# Altium PCB pcb_numpad.PcbDoc
Units mil, origin at the board's own origin, x right, y up, seen from the top; angles counter-clockwise.
Board outline 2620 x 4535 mil, 2 copper layers (Top Layer, Bottom Layer); 31 components, 25 nets, 183 pads, 10 vias.
Unrouted connection lines stored in the file: 9.
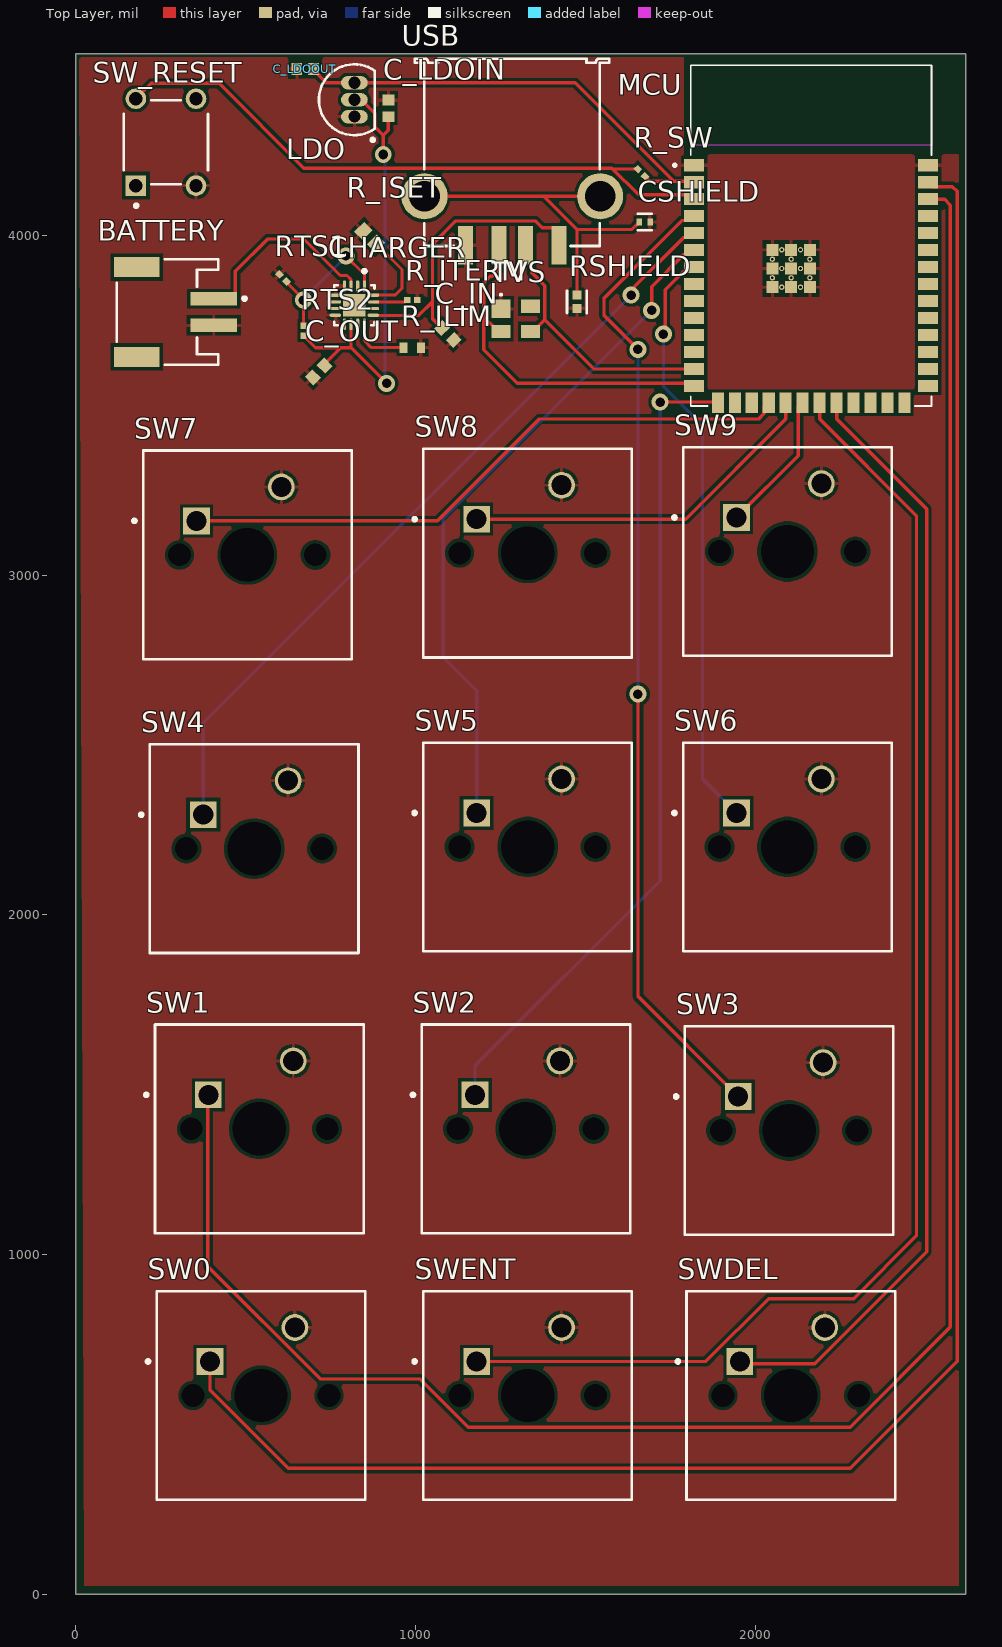
[diagram p0: Top Layer view]
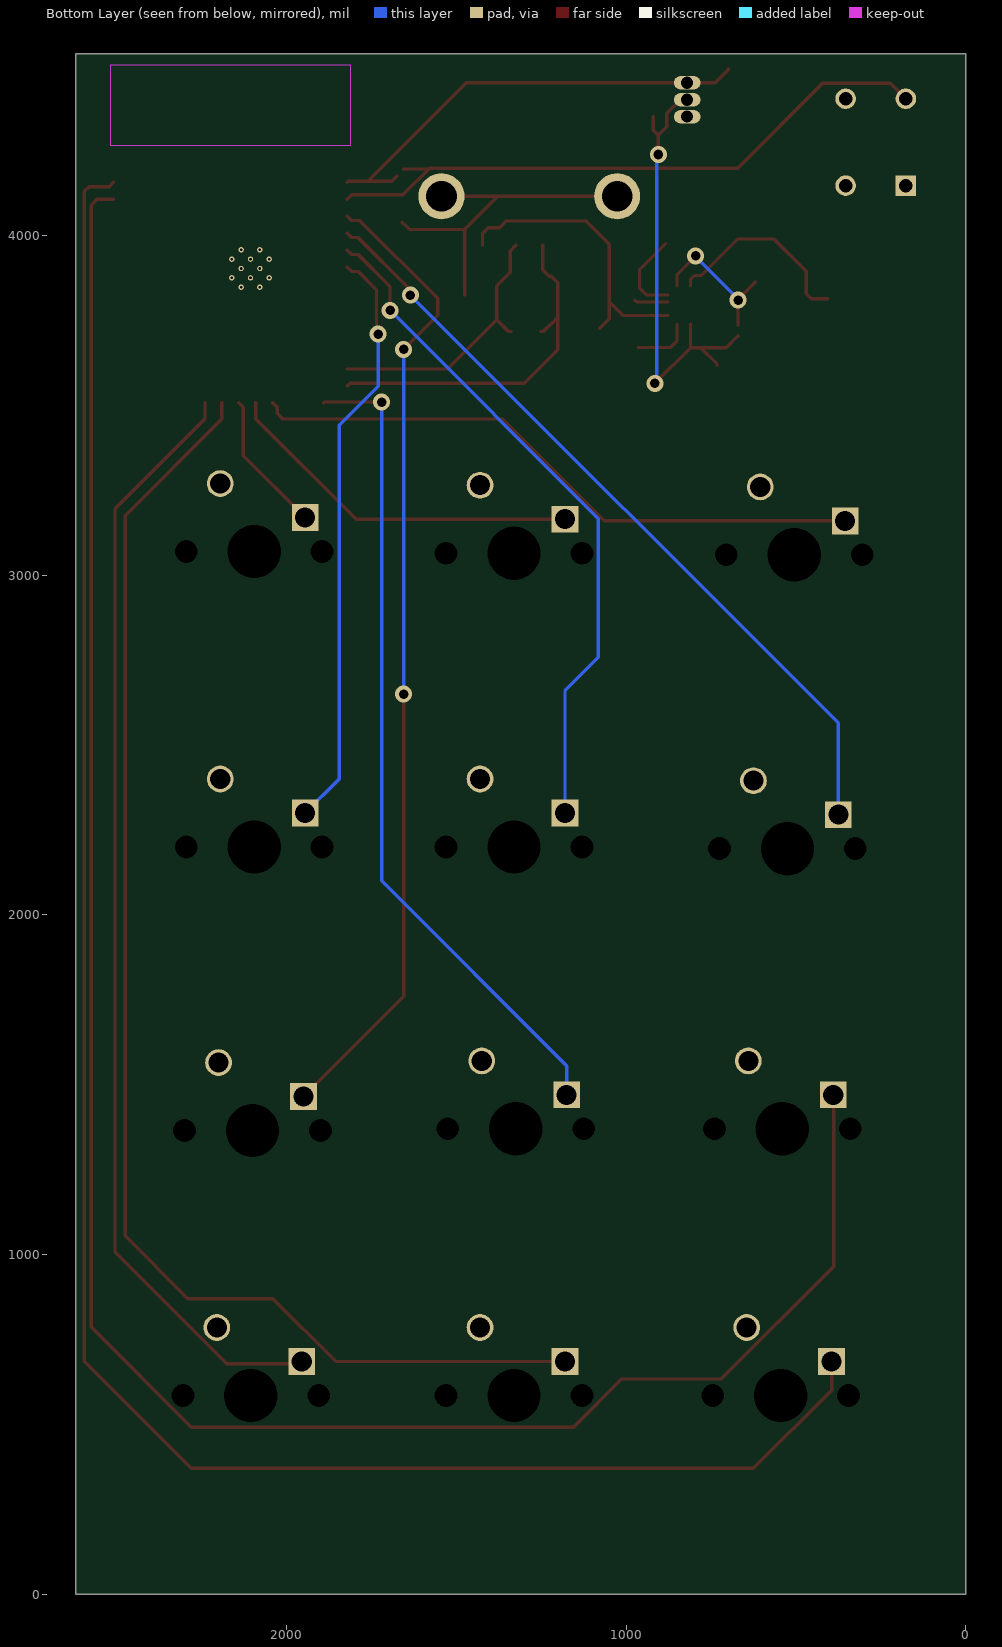
[diagram p1: Bottom Layer view, seen from below]

## Layer stack, top to bottom
Top Solder: solder mask 0.4, Solder Resist, Dk 3.5
Top Layer: signal copper 1.4
Dielectric 1: dielectric 12.6, FR-4, Dk 4.8
Bottom Layer: signal copper 1.4
Bottom Solder: solder mask 0.4, Solder Resist, Dk 3.5

## Board outline
0,0 2620,0 2620,4535 0,4535

## Design rules (kind name [scope] priority, off if disabled: settings)
Clearance [All] p1: gap=10 ignorepadtopadclearanceinfootprint=TRUE
PolygonConnect [All] p1: connectstyle=Relief reliefconductorwidth=10 reliefentries=4 polygonreliefangle="90 Angle" airgapwidth=10
RoutingVias [All] p1: holewidth=28 width=50 viastyle="Through Hole" minholewidth=28 minwidth=50 maxholewidth=28 maxwidth=50
SolderMaskExpansion [All] p1: expansion=4 istentingtop=FALSE
SupplyNets "Schematic Supply Nets" [InNet('GND')] p1: voltage=0.000
Width [All] p1: maxlimit=10 minlimit=9 preferedwidth=10 bottomlayer_minwidth=10 minimp=50.000000 maximp=50.000000 favimp=50.000000
30 further rules are at their usual default settings.

## Classes and differential pairs
component class numpad: BATTERY C_IN C_OUT CHARGER LDO MCU R_ILIM R_ISET R_ITERM RSHIELD RTS1 RTS2 SW0 SW1 SW2 SW3 SW4 SW5 SW6 SW7 SW8 SW9 SW_RESET SWDEL SWENT TVS

## Components (designator, comment, footprint, x,y, rotation, side; value= is the part's Value field where it differs from the comment)
BATTERY "500 mA" "JST- S2B-PH-SM4-TB(LF)(SN)-2_V" 270,3775 r270 top
C_IN "1 uF" CAPC1608X87X35LL15T15 1095,3710 r315 top
C_LDOIN "1 uF" CAPC1608X87X35LL15T15 920,4374.61 r90 top
C_LDOOUT "1 uF" CAPC1608X87X35LL15T15 675,4490 r0 top
C_OUT "1 uF" CAPC1608X87X35LL15T15 715,3600 r225 top
CHARGER "BQ24074RGTR" FP-RGT0016C-IPC_B 820,3795 r270 top
CSHIELD "0.1 uF" FP-GRM15-MFG 1675,4040 r0 top value=0.10μF
LDO "MCP1700-3302E/TO" TO-92-TO3 820,4400 r0 top
MCU "ESP32-S3-WROOM-1-N16R2" XCVR_ESP32-S3-WROOM-1-N16R2 2165,4000 r0 top
R_ILIM "2.2 K" RESC1608X55X25LL10T15 990,3670 r180 top
R_ISET "CRCW" RESC1609X50X30ML10T20 865,3995 r315 top
R_ITERM "RC04" RESC1005X40X25LL05T10 990.24,3810 r180 top
R_SW "10 K" RESC1005X40X25LL05T10 1665,4185 r135 top
RSHIELD "1 M" FP-MCR01-IPC_A 1475,3805 r90 top
RTS1 "10 K" RESC1005X40X25LL05T10 609.56,3875.44 r315 top
RTS2 "10 K" RESC1005X40X25LL05T10 670,3720 r90 top
SW0 "MX1A-11NW" CHRY-MX1A-11NW_V 545,585 r0 top
SW1 "MX1A-11NW" CHRY-MX1A-11NW_V 540,1370 r0 top
SW2 "MX1A-11NW" CHRY-MX1A-11NW_V 1325,1370 r0 top
SW3 "MX1A-11NW" CHRY-MX1A-11NW_V 2100,1365 r0 top
SW4 "MX1A-11NW" CHRY-MX1A-11NW_V 525,2195 r0 top
SW5 "MX1A-11NW" CHRY-MX1A-11NW_V 1330,2200 r0 top
SW6 "MX1A-11NW" CHRY-MX1A-11NW_V 2095,2200 r0 top
SW7 "MX1A-11NW" CHRY-MX1A-11NW_V 505,3060 r0 top
SW8 "MX1A-11NW" CHRY-MX1A-11NW_V 1330,3065 r0 top
SW9 "MX1A-11NW" CHRY-MX1A-11NW_V 2095,3070 r0 top
SW_RESET "3-1825910-1" FP-3-1825910-1-MFG 265,4275 r90 top
SWDEL "MX1A-11NW" CHRY-MX1A-11NW_V 2105,585 r0 top
SWENT "MX1A-11NW" CHRY-MX1A-11NW_V 1330,585 r0 top
TVS "8240116" WE-TVS_SOT143-4L 1295,3755 r270 top
USB "62900416021" 62900416021 1285,4245 r180 top

## Footprints (in the part's own frame and the unit in brackets; to place one, negate y for a bottom-side part, rotate by r counter-clockwise, add the part's x,y. Pads: shape width x height; smd on the part's side, far side on the other; paste and mask are expansions set on the pad)
62900416021 [mm] "USB 2.0 SMT Type A Horizontal"
  rect 1.12x2.88 smd: 1(-3.5,6.95) 2(-1,6.95) 3(1,6.95) 4(3.5,6.95)
  round 3.45 hole 2.3: Shell(-6.57,3.28) Shell(6.57,3.28)
  silkscreen extent -7.25,-7 7.29,7, body extent -7.81,-7 7.81,8.41, height 7.81
CAPC1608X87X35LL15T15 [mm] "Chip Capacitor, 2-Leads, Body 1.60x0.80mm, IPC High Density"
  rect 0.8x0.9 smd: 1(-0.625,0) 2(0.625,0)
  body extent -0.87,-0.48 0.87,0.48, height 0.87
CHRY-MX1A-11NW_V [mm] "THD, 2-Leads, Body 15.6x15.6mm"
  rect 2x2 hole 1.499 paste-2539.97: 1(-3.81,2.54)
  round 2 hole 1.499 paste-2539.97: 2(2.54,5.08)
  round 0 hole 3.988 unplated paste-2539.97: MH1(0,0)
  round 0 hole 1.702 unplated paste-2539.97: MH2(-5.08,0) MH3(5.08,0)
  silkscreen extent -8.57,-7.8 7.8,7.8, body extent -7.8,-7.8 7.8,7.8, height 15.2
FP-3-1825910-1-MFG [mm]
  rect 1.54x1.54 hole 0.99 paste-2539.97 mask+0: 1(-3.25,2.25)
  round 1.54 hole 0.99 paste-2539.97 mask+0: 2(3.25,2.25) 3(-3.25,-2.25) 4(3.25,-2.25)
  silkscreen extent -4.87,-3.15 3.15,3.15, body extent -4.12,-3.24 4.12,3.24, height 0.25
FP-GRM15-MFG [mm]
  rect 0.4x0.5 smd paste+0 mask+0: 1(-0.4,0) 2(0.4,0)
  silkscreen extent -0.53,-0.63 0.53,0.63, body extent -0.7,-0.38 0.7,0.38, height 0.25
FP-MCR01-IPC_A [mil]
  rect 26.24x26.48 smd paste+0 mask+0: 1(-19.8,0) 2(19.8,0)
  silkscreen extent -33,-29 33,29, body extent -41,-21 41,21, height 10
FP-RGT0016C-IPC_B [mm]
  rect 0.866x0.239 smd paste+0 mask+0: 1(-1.423,0.75)
  rrect100% 0.866x0.239 smd paste+0 mask+0: 2(-1.423,0.25) 3(-1.423,-0.25) 4(-1.423,-0.75) 9(1.423,-0.75) 10(1.423,-0.25) 11(1.423,0.25) 12(1.423,0.75)
  rrect100% 0.239x0.866 smd paste+0 mask+0: 5(-0.75,-1.423) 6(-0.25,-1.423) 7(0.25,-1.423) 8(0.75,-1.423) 13(0.75,1.423) 14(0.25,1.423) 15(-0.25,1.423) 16(-0.75,1.423)
  rect 1.68x1.68 smd paste-1000 mask+0: 17(0,0)
  silkscreen extent -2.67,-1.5 1.5,1.5, body extent -2.11,-2.11 2.11,2.11, height 0.25
"JST- S2B-PH-SM4-TB(LF)(SN)-2_V" [mm] "SMD, 2-Leads, Body 7.9x7.6mm, Pitch 2mm"
  rect 1x3.5 smd: 1(-1,3.45) 2(1,3.45)
  rect 1.5x3.4 smd: MP1(-3.35,-2.3) MP2(3.35,-2.3)
  silkscreen extent -3.95,-3.8 3.95,5.88, body extent -3.95,-3.8 3.95,4.8, height 5.6
RESC1005X40X25LL05T10 [mm] "Chip Resistor, 2-Leads, Body 1.00x0.50mm, IPC High Density"
  rect 0.5x0.45 smd: 1(-0.375,0) 2(0.375,0)
  body extent -0.53,-0.27 0.53,0.28, height 0.4
RESC1608X55X25LL10T15 [mm] "Chip Resistor, 2-Leads, Body 1.60x0.80mm, IPC High Density"
  rect 0.6x0.8 smd: 1(-0.65,0) 2(0.65,0)
  body extent -0.85,-0.45 0.85,0.45, height 0.55
RESC1609X50X30ML10T20 [mm] "Chip Resistor, 2-Leads, Body 1.55x0.85mm, IPC Low Density"
  rect 0.9x1.05 smd: 1(-0.675,0) 2(0.675,0)
  body extent -0.82,-0.48 0.82,0.48, height 0.5
TO-92-TO3 [mm] "TO, Flat Index; 3 In-Line, Axial Leads; Body Dia. 4.8mm; Leads 0.56 x 0.53 mm (max)"
  oval 2x1 hole 0.9: 1(0,-1.27) 2(0,0) 3(0,1.27)
  silkscreen extent -2.65,-3.13 1.52,2.65, body extent -2.65,-2.66 1.52,2.66, height 5.33
WE-TVS_SOT143-4L [mm] "TVS Diode, package SOT143-4L"
  rect 1.4x1.4 smd: 1(-0.75,-1.1)
  rect 1x1.4 smd: 2(0.95,-1.1) 3(0.95,1.1) 4(-0.95,1.1)
  silkscreen extent -1.87,-1.17 -1.73,-1.02, body extent -1.46,-1.2 1.46,1.2, height 1.05
XCVR_ESP32-S3-WROOM-1-N16R2 [mm]
  rect 1.5x0.9 smd: 2(-8.75,3.99) 3(-8.75,2.72) 4(-8.75,1.45) 5(-8.75,0.18) 6(-8.75,-1.09) 7(-8.75,-2.36) 8(-8.75,-3.63) 9(-8.75,-4.9) 10(-8.75,-6.17) 11(-8.75,-7.44) 12(-8.75,-8.71) 13(-8.75,-9.98) 14(-8.75,-11.25) 27(8.75,-11.25) 28(8.75,-9.98) 29(8.75,-8.71) 30(8.75,-7.44) 31(8.75,-6.17) 32(8.75,-4.9) 33(8.75,-3.63) 34(8.75,-2.36) 35(8.75,-1.09) 36(8.75,0.18) 37(8.75,1.45) 38(8.75,2.72) 39(8.75,3.99) GND(-8.75,5.26) GND(8.75,5.26)
  rect 0.9x1.5 smd: 15(-6.985,-12.5) 16(-5.715,-12.5) 17(-4.445,-12.5) 18(-3.175,-12.5) 19(-1.905,-12.5) 20(-0.635,-12.5) 21(0.635,-12.5) 22(1.905,-12.5) 23(3.175,-12.5) 24(4.445,-12.5) 25(5.715,-12.5) 26(6.985,-12.5)
  round 0.4 hole 0.2 mask+0: 41_10(-1.5,-1.76) 41_11(-2.9,-1.76) 41_12(-0.1,-1.76) 41_13(-2.9,-3.16) 41_14(-1.5,-3.16) 41_15(-0.1,-3.16) 41_16(-2.2,-1.06) 41_17(-0.8,-1.06) 41_18(-2.2,-2.46) 41_19(-0.8,-2.46) 41_20(-2.2,-3.86) 41_21(-0.8,-3.86)
  rect 0.9x0.9 smd: GND(-2.9,-3.86) GND(-2.9,-2.46) GND(-2.9,-1.06) GND(-1.5,-3.86) GND(-1.5,-2.46) GND(-1.5,-1.06) GND(-0.1,-3.86) GND(-0.1,-2.46) GND(-0.1,-1.06)
  Keep-Out Layer region: 9,6.75 -9,6.75 -9,12.75 9,12.75
  Keep-Out Layer region: 9,6.75 -9,6.75 -9,12.75 9,12.75
  silkscreen extent -10.3,-12.75 9,12.75, body extent -9,-12.75 9,12.75, height 3.25

## Part data
BATTERY: library part CMP-1755-00001-1, "Male Header, Pitch 2 mm, 1 x 2 Position, Height 5.5 mm, -25 to 85 degC, RoHS, Tape and Reel", Colour=Black, Current Rating="3 A", Max Operating Temperature=105degC, Min Operating Temperature=-65degC, Package Quantity=100, ComponentLink1Description="Manufacturer URL", ComponentLink1URL=http://www.jst.com/home2.html, ComponentLink2Description=Datasheet, ComponentLink2URL=http://www.jst-mfg.com/product/pdf/eng/ePH.pdf, Contact Finish=Lead, Contact Material=Bronze, Contact Plating=Tin, DatasheetVersion=Dec-12, Height="8.13 mm", Lead Pitch="0.1 inch", Length="101.19 mm", Mount="Through Hole", PackageDescription="Male Header, Pitch 2 mm, 1 x 2 Position, Height 5.5 mm", PackageReference=S2B-PH-SM4-TB(LF)(SN)-2, Packaging=Bulk, Pins=40, Radiation Hardening=No, RoHSCompliant=True, Width="2.34 mm"
C_IN C_LDOIN C_LDOOUT C_OUT: library part CMP-2006-03713-1, Manufacturer=Kemet, Part Number=C0603C105K3RACTU
CHARGER: library part CMP-0321-00220-3, "IC LI-ION CHARGE MGMT 16-QFN", Battery Pack Voltage=4.2V, Case/Package=VQFN, Max Charge Current=1.5A, Max Operating Temperature=125°C, Max Supply Voltage=10.2V, Min Input Voltage=4.3V, Min Operating Temperature=-40°C, Min Supply Voltage=4.35V, Package Quantity=3000, Battery Chemistry=LITHIUM-ION, Contact Plating=Gold, Fault Protection="Over Voltage", Interface=USB, Lead Free="Lead Free", Number of Cells=1, Number of Pins=16, Output Current=1.5A, Output Voltage=4.2V, Packaging="Tape and Reel", Radiation Hardening=No, RoHS Compliant=Yes, Series=-, Weight=0.000808oz
CSHIELD: library part CMP-2100-03641-2, "CAP CER 0.1UF 16V X7R 0402", Capacitance=0.10μF, Manufacturer=Murata, Manufacturer Part Number=GRM155R71C104KA88D, Package=GRM15, Temperature="-55°C to +125°C", Temperature Characteristic=X7R, Temperature Range High=+125°C, Temperature Range Low=-55°C, Tolerance=10%, Voltage Rating=16Vdc, Category=Cap, ComponentLink2Description=Datasheet, ComponentLink2URL=https://search.murata.co.jp/Ceramy/image/img/A01X/G101/ENG/GRM155R71H471KA01-01A.pdf, Device Class L1="Passive Components", Device Class L2=Capacitors, Device Class L3="Ceramic Capacitors", Digikey Description="CAP CER 0.1UF 16V X7R 0402", Height=0.55mm, Ipc Land Pattern Name=CAPC10050X219, Lead Free=yes, Material=Ceramic, Mouser Description="0402 0.1 uF 16V ±10 % Tolerance X7R SMT Multilayer Ceramic Capacitor", Octopart=https://octopart.com/grm155r71c104ka88d-murata-196880, RoHS=TRUE, Standoff Height=0mm
LDO: library part CMP-0136-00007-1, "Low Quiescent Current LDO, 3-Pin TO-92, Extended TemperatureBAG", DatasheetVersion="revB, Feb-2007", PackageDescription="3-Lead Plastic Transistor Outline (TO) [TO-92]", PackageReference=TO-92-TO3, PackageVersion="revBB, Aug-2009"
MCU: library part CMP-003-000000-1, "Bluetooth, WiFi 802.11b/g/n, Bluetooth v5.0 Transceiver Module 2.4GHz PCB Trace Surface Mount", Package="NON STANDARD Espressif Systems", Check_prices=https://www.snapeda.com/parts/ESP32S3WROOM1N16R2/Espressif+Systems/view-part/?ref=eda, Component Type=Standard, Design Item ID=ESP32-S3-WROOM-1-N16R2, MF="Espressif Systems", MP=ESP32S3WROOM1N16R2, Pin Count=39, SnapEDA_Link=https://www.snapeda.com/parts/ESP32S3WROOM1N16R2/Espressif+Systems/view-part/?ref=snap, Source=ESP32-S3-WROOM-1-N16R2.SchLib
R_ILIM: library part CMP-2000-06934-1, "Thick Film Resistor, 2.2 KOhm, 100 mW, 50 V, +/- 1%, -55 to 155 degC, 2-Pin SMD (0603), RoHS, Tape and Reel", Case Code - in=0603, Case Code - mm=1608, Manufacturer=Yageo, Operating Temperature Range=-55Cto+155C, Package Description="2-Pin Surface Mount Device, Body 1.6 x 0.8 mm", Power Rating=100mW, Resistance=2.2kOhms, Temperature Coefficient=100PPM/C, Tolerance=1%, Voltage Rating=50V, Datasheet URL=http://www.yageo.com/documents/recent/PYu-RC_Group_51_RoHS_L_7.pdf, Datasheet Version="Rev. 7, 05/2017", Manufacturer URL=http://www.yageo.com/, Mounting Technology=SurfaceMount, Package Reference=0603, Packaging=Reel, Product=ThickFilmResistorsGeneralPurpose, Series=RC, Termination Style=SMD/SMT
R_ISET: library part CMP-2000-03159-1, Manufacturer="Vishay Dale", Part Number="2 K"
R_ITERM R_SW RTS1 RTS2: library part CMP-2002-07353-1, Manufacturer="Yageo / Phycomp", Part Number=RC0402FR-0710KL
RSHIELD: library part CMP-08839-004923-1, "Thick Film Chip Resistor, 0402, 1MΩ, 5%, 200ppm/°C, 0.063W, 50V", Case Code (Imperial)=0402, Case Code (Metric)=1005, Max Operating Temperature=155°C, Max Power Dissipation=63mW, Min Operating Temperature=-55°C, Package Quantity=1, Resistance=1MR, Resistor Type="Thick Film", Temperature Coefficient=200ppm/°C, Tolerance=5%, Voltage Rating (DC)=50V, Case/Package=0402, Height=0.016inch, Length=0.039inch, Number of Terminations=2, Packaging="Tape and Reel", RoHS Compliant=Yes, Series=MCR, Width=0.02inch
SW0 SW1 SW2 SW3 SW4 SW5 SW6 SW7 SW8 SW9 SWDEL SWENT: library part CMP-2000-06786-1, "Keylock Switch, 12 V, -10 to 70 degC, 2-Pin THD, RoHS, Bulk", Actuator Color=N/A, Illumination Color=N/R, Manufacturer=Cherry, Maximum AC Voltage Rating=12V, Maximum Contact Resistance=200mOhm, Maximum Current Rating=0.01A, Minimum Insulation Resistance=100MOhm, Operating Force=0.58N, Operating Temperature=-10to70C, Package Description="2-Pin Through Hole Device, Body 15.6 x 15.6 mm", Part No=MX1A11NW, Actuator Length=3.6mm, Actuator Material=N/A, Actuator Style=Button, Body Orientation=Straight, Contact Material=Silver/Gold, Contact Plating=N/A, COO=UK, Datasheet URL=https://cdn.sparkfun.com/datasheets/Components/Switches/MX%20Series.pdf, Datasheet Version=09/2000, Dielectric Strength=N/A, Dimension=15.6x15.6x15.2mm, ECCN=EAR99, Electrical Life=50000000Cycle, Family=MX, Housing Material=N/A, HTS=8536509065, Illumination Type=N/R, IP Rating=N/A, Manufacturer URL=http://cherryswitches.com/cn/, Maximum DC Voltage Rating=12V, Maximum Power Rating=N/A, Mechanical Life=N/A, Mounting=ThroughHole, Mounting Technology=ThroughHole, Number of Terminals=2, Operating Speed=N/A, Package Reference=MX1A-11NW, Packaging=N/A, Pole Throw Configuration=SPST, RoHS=Unknown, Row Spacing=6.35mm, Supplier=CherryElectrical, Switch Configuration=N.O., Terminal Pitch=2.54mm, Terminal Type=PCPins, Total Travel=4.06mm, Type=DesktopProfile
SW_RESET: library part CMP-03407-000001-1, "SWITCH TACTILE SPST-NO 0.05A 24V", Contact Current Rating=50mA, Contact Resistance=100mΩ, Manufacturer="TE Connectivity", Operating Force=160gf, Package=0, Temperature="-35°C to +85°C", Temperature Range High=+85°C, Temperature Range Low=-35°C, Automotive=No, Category=Switch, ComponentLink2Description=Datasheet, ComponentLink2URL=https://www.te.com/commerce/DocumentDelivery/DDEController?Action=srchrtrv&DocNm=1825910&DocType=Customer+Drawing&DocLang=English, Device Class L1=Electromechanical, Device Class L2=Switches, Device Class L3="Tactile Switches", Digikey Description="SWITCH TACTILE SPST-NO 0.05A 24V", Electromechanical Life=100000Cycles, Height=17.3mm, Lead Free=Yes, Manufacturer Part Number=3-1825910-1, Mount="Through Hole", Octopart=https://octopart.com/3-1825910-1-te+connectivity-46506874, RoHS=TRUE, Throw Configuration=SPST-NO
TVS: library part CMP-1486-00003-2, Breakdown Voltage=6.1V, Capacitance=2pF, Case/Package=SOT-143, Clamping Voltage=7.8V, Forward Voltage=700mV, Leakage Current=5µA, Max Operating Temperature=125°C, Max Reverse Leakage Current=5A, Max Surge Current=12A, Min Operating Temperature=-55°C, Power Line Protection=Yes, Reverse Standoff Voltage=5V, Test Current=1mA, Direction=Unidirectional, Element Configuration=Dual, ESD Protection=Yes, Height=1.06mm, Length=2.92mm, Max Breakdown Voltage=6.1V, Min Breakdown Voltage=6.1V, Mount="Surface Mount", NexarPartId=18190098, Number of Bidirectional Channels=2, Number of Channels=2, Number of Pins=4, Packaging="Cut Tape (CT)", Peak Pulse Current=12A, Polarity=Bidirectional, REACH SVHC="No SVHC", RoHS=Compliant, Termination=SMD/SMT, Width=2.4mm, Working Voltage=5V
USB: library part CMP-1502-03240-2, Contact Resistance=20mΩ, Current Rating=1.5A, Insulation Resistance=1GΩ, Max Operating Temperature=105°C, Min Operating Temperature=-40°C, Operating Supply Voltage=30V, Connector Type=USB, Contact Plating=Gold, Features=Shielded, Gender=Receptacle, Lead Free="Lead Free", Length=14.4mm, Mount="Horizontal, Surface Mount", NexarPartId=19991170, Number of Contacts=4, Number of Pins=4, Orientation=Horizontal, Packaging="Cut Tape", REACH SVHC=Unknown, RoHS=Compliant, Termination=SMD/SMT, USB Standard="USB 2.0"

## Via types
v1: diameter 50, hole 28, Top Layer to Bottom Layer, 10 vias

## Nets (pads, with @x,y where several pads share a name; then routed paths per layer and width w, separated by ;. In a path a pad name is that pad's centre, name@x,y a point inside that pad or via, vN(x,y) a via of type N, cw(c..) or ccw(c..) an arc to the next point about the centre after c; other vN are vias at no path point)
+3.3V: C_LDOOUT.2 LDO.3 MCU.2 R_SW.1 | length 1350.5
  Top Layer w10: C_LDOOUT.2 699.61,4488.03 737.64,4450 LDO.3 1470,4450 1760,4160 ; R_SW.1 1690,4160 1760,4160 ; MCU.2 1817.6,4160 1760,4160
+4.4V: C_LDOIN.1 C_OUT.1 CHARGER.10 LDO.2 RTS2.1 | length 1392
  Top Layer w9: RTS2.1 670,3704.25 674.36,3699.89 675.34,3699.89 705.39,3669.84 779.84,3669.84 ; C_OUT.1 732.4,3622.4 779.84,3669.84 ; CHARGER.10 810.16,3669.84 779.84,3669.84
  Top Layer w10: 810.16,3669.84 v1(915,3565) ; LDO.2 839.68,4400 880,4359.69 880,4320 905,4295 ; v1(905,4238.78) 905,4295 ; C_LDOIN.1 920,4310 905,4295
  Bottom Layer w10: v1(905,4238.78) 910,4233.78 910,3570 v1(915,3565)
BAT: BATTERY.1 CHARGER.3 | length 584.7
  Top Layer w9: 671.18,3990 778.61,3882.57 798.43,3882.57 809.71,3871.29 809.71,3863.92 810.19,3863.45 CHARGER.3@810.19,3851.06
  Top Layer w10: BATTERY.1 455.04,3814.37 469.72,3829.06 469.72,3894.72 565,3990 671.18,3990
Data+: MCU.14 TVS.2 USB.3 | length 1061.3
  Top Layer w10: USB.3 1245.63,3899.69 1226.14,3880.19 1220.32,3880.19 1200.83,3860.7 1200.83,3759.06 ; TVS.2 1243.82,3717.6 1219.45,3741.97 1217.92,3741.97 1200.83,3759.06 ; MCU.14 1812.6,3565 1300,3565 1200.83,3664.17 1200.83,3759.06
Data-: MCU.13 TVS.3 USB.2 | length 799.2
  Top Layer w10: USB.2 1341.42,3954.33 1341.42,3891.84 1380.87,3852.39 1380.87,3752.28 ; TVS.3 1346.18,3717.6 1380.87,3752.28 ; MCU.13 1526.06,3607.09 1380.87,3752.28
GND: BATTERY.2 C_IN.2 C_LDOIN.2 C_LDOOUT.1 C_OUT.2 CHARGER.4 CHARGER.5 CHARGER.6 CHARGER.8 CHARGER.14 CHARGER.17 CSHIELD.2 LDO.1 MCU.GND R_ILIM.1 R_ISET.1 R_ITERM.1 RSHIELD.1 RTS1.1 SW0.2 SW1.2 SW2.2 SW3.2 SW4.2 SW5.2 SW6.2 SW7.2 SW8.2 SW9.2 SW_RESET.3 SWDEL.2 SWENT.2 TVS.1 USB.4
NetCHARGER_1: CHARGER.1 RTS1.2 RTS2.2 | length 444.3
  Top Layer w9: RTS1.2 620,3862.5 670,3812.5 v1(670,3810) RTS2.2 ; v1(795,3940) 849.53,3885.47 CHARGER.1
  Bottom Layer w10: v1(670,3810) 670,3812.5 795,3937.5 v1(795,3940)
NetCHARGER_12: CHARGER.12 R_ILIM.2 | length 171.9
  Top Layer w9: CHARGER.12 849.53,3690.47 870,3670 R_ILIM.2
NetCHARGER_15: CHARGER.15 R_ITERM.2 | length 101.6
  Top Layer w9: CHARGER.15 969.33,3804.84 974.49,3810 R_ITERM.2
NetCHARGER_16: CHARGER.16 R_ISET.2 | length 255.2
  Top Layer w9: CHARGER.16 939.53,3824.53 960,3845 960,3900 R_ISET.2
NetCSHIELD_1: CSHIELD.1 RSHIELD.2 USB.Shell | length 1043.1
  Top Layer w9: USB.Shell@1026.34,4115.87 1377.55,4115.87 ; RSHIELD.2 1475,4018.42 ; USB.Shell@1543.66,4115.87 1377.55,4115.87 ; CSHIELD.1 1659.25,4038.03 1655.88,4034.66 1653.91,4034.66 1637.67,4018.42 1475,4018.42 ; 1377.55,4115.87 1475,4018.42
RESET: MCU.3 R_SW.2 SW_RESET.2 | length 1882.1
  Top Layer w10: SW_RESET.2 221.73,4448.27 421.73,4448.27 671.22,4198.78 1578.01,4198.78 ; R_SW.2 1653.86,4196.14 1580.65,4196.14 1578.01,4198.78 ; MCU.3 1807.8,4119.8 1656.98,4119.8 1578.01,4198.78
SW0: MCU.39 SW0.1 | length 6052.5
  Top Layer w10: SW0.1 395,600 625,370 2280,370 2595,685 2595,4130 2580.63,4144.37 2522.2,4144.37 MCU.39
SW1: MCU.38 SW1.1 | length 6386.8
  Top Layer w10: SW1.1 388.5,1468.5 388.5,964.61 719.61,633.5 1012.91,633.5 1154.91,491.5 2280.09,491.5 2575,786.41 2575,4090 2557.91,4107.09 MCU.38
SW2: MCU.15 SW2.1 | length 2436.6
  Top Layer w10: v1(1720,3510) 1887.87,3510 MCU.15
  Bottom Layer w10: SW2.1 1175,1555 1720,2100 v1(1720,3510)
SW3: MCU.4 SW3.1 | length 2879.4
  Top Layer w10: v1(1655,2650) 1655,1760 SW3.1 ; v1(1655,3665) 1555,3765 1555,3815 1784.37,4044.37 1807.8,4044.37 MCU.4
  Bottom Layer w10: v1(1655,2650) v1(1655,3665)
SW4: MCU.5 SW4.1 | length 2321.6
  Top Layer w10: v1(1635,3825) 1642.65,3832.65 1642.65,3847.69 1789.34,3994.37 1807.8,3994.37 MCU.5
  Bottom Layer w10: SW4.1 375,2565 v1(1635,3825)
SW5: MCU.6 SW5.1 | length 2014.8
  Top Layer w10: v1(1695,3780) 1695,3850.03 1789.34,3944.37 1807.8,3944.37 MCU.6
  Bottom Layer w10: SW5.1 1180,2660.48 1081.5,2758.98 1081.5,3166.5 v1(1695,3780)
SW6: MCU.7 SW6.1 | length 1744.4
  Top Layer w10: v1(1730,3710) 1735,3715 1735,3840.03 1789.34,3894.37 1807.8,3894.37 MCU.7
  Bottom Layer w10: v1(1730,3710) 1730,3556.57 1845,3441.57 1845,2400 SW6.1
SW7: MCU.18 SW7.1 | length 1839.9
  Top Layer w10: SW7.1 1064.69,3160 1364.69,3460 2010.58,3460 2027.28,3476.7 2027.28,3495.16 MCU.18
SW8: MCU.19 SW8.1 | length 1080.1
  Top Layer w10: SW8.1 1795,3165 2090,3460 MCU.19
SW9: MCU.20 SW9.1 | length 418.6
  Top Layer w10: SW9.1 2127.28,3352.28 2127.28,3495.16 MCU.20
SWDEL: MCU.22 SWDEL.1 | length 3298.8
  Top Layer w10: SWDEL.1 1961.5,678.5 2175.39,678.5 2505,1008.11 2505,3195 2240,3460 MCU.22
SWENT: MCU.21 SWENT.1 | length 4019.2
  Top Layer w10: SWENT.1 1855.05,685 2040.05,870 2290,870 2475,1055 2475,3175 2190,3460 MCU.21
VBUS: C_IN.1 CHARGER.13 USB.1 | length 900
  Top Layer w9: CHARGER.13@876.03,3765 1010,3765
  Top Layer w10: 1010,3765 1050,3805 ; C_IN.1 1050,3755 1050,3805 ; USB.1 1422.8,4006.02 1405.75,4023.07 1372.63,4023.07 1352.63,4043.07 1118.94,4043.07 1050,3974.13 1050,3805
pads on no net: BATTERY.MP1 BATTERY.MP2 CHARGER.2 CHARGER.7 CHARGER.9 CHARGER.11 MCU.8 MCU.9 MCU.10 MCU.11 MCU.12 MCU.16 MCU.17 MCU.23 MCU.24 MCU.25 MCU.26 MCU.27 MCU.28 MCU.29 MCU.30 MCU.31 MCU.32 MCU.33 MCU.34 MCU.35 MCU.36 MCU.37 MCU.41_10 MCU.41_11 MCU.41_12 MCU.41_13 MCU.41_14 MCU.41_15 MCU.41_16 MCU.41_17 MCU.41_18 MCU.41_19 MCU.41_20 MCU.41_21 SW0.MH1 SW0.MH2 SW0.MH3 SW1.MH1 SW1.MH2 SW1.MH3 SW2.MH1 SW2.MH2 SW2.MH3 SW3.MH1 SW3.MH2 SW3.MH3 SW4.MH1 SW4.MH2 SW4.MH3 SW5.MH1 SW5.MH2 SW5.MH3 SW6.MH1 SW6.MH2 SW6.MH3 SW7.MH1 SW7.MH2 SW7.MH3 SW8.MH1 SW8.MH2 SW8.MH3 SW9.MH1 SW9.MH2 SW9.MH3 SW_RESET.1 SW_RESET.4 SWDEL.MH1 SWDEL.MH2 SWDEL.MH3 SWENT.MH1 SWENT.MH2 SWENT.MH3 TVS.4

## Polygon pours and split planes (outlines as drawn)
GND on Top Layer "GND_L01_P000" (solid, pour order 0): 10,4525 1790,4525 1790,4240 2605,4240 2600,4235 2600,25 25,25

## Text inside footprints (layer, text, board x,y; h text height)
MCU: Mechanical 13 "ANTENNA" at 1987.83,4374.02 h50